# EAGLE board FY (EAGLE 9.6.2)
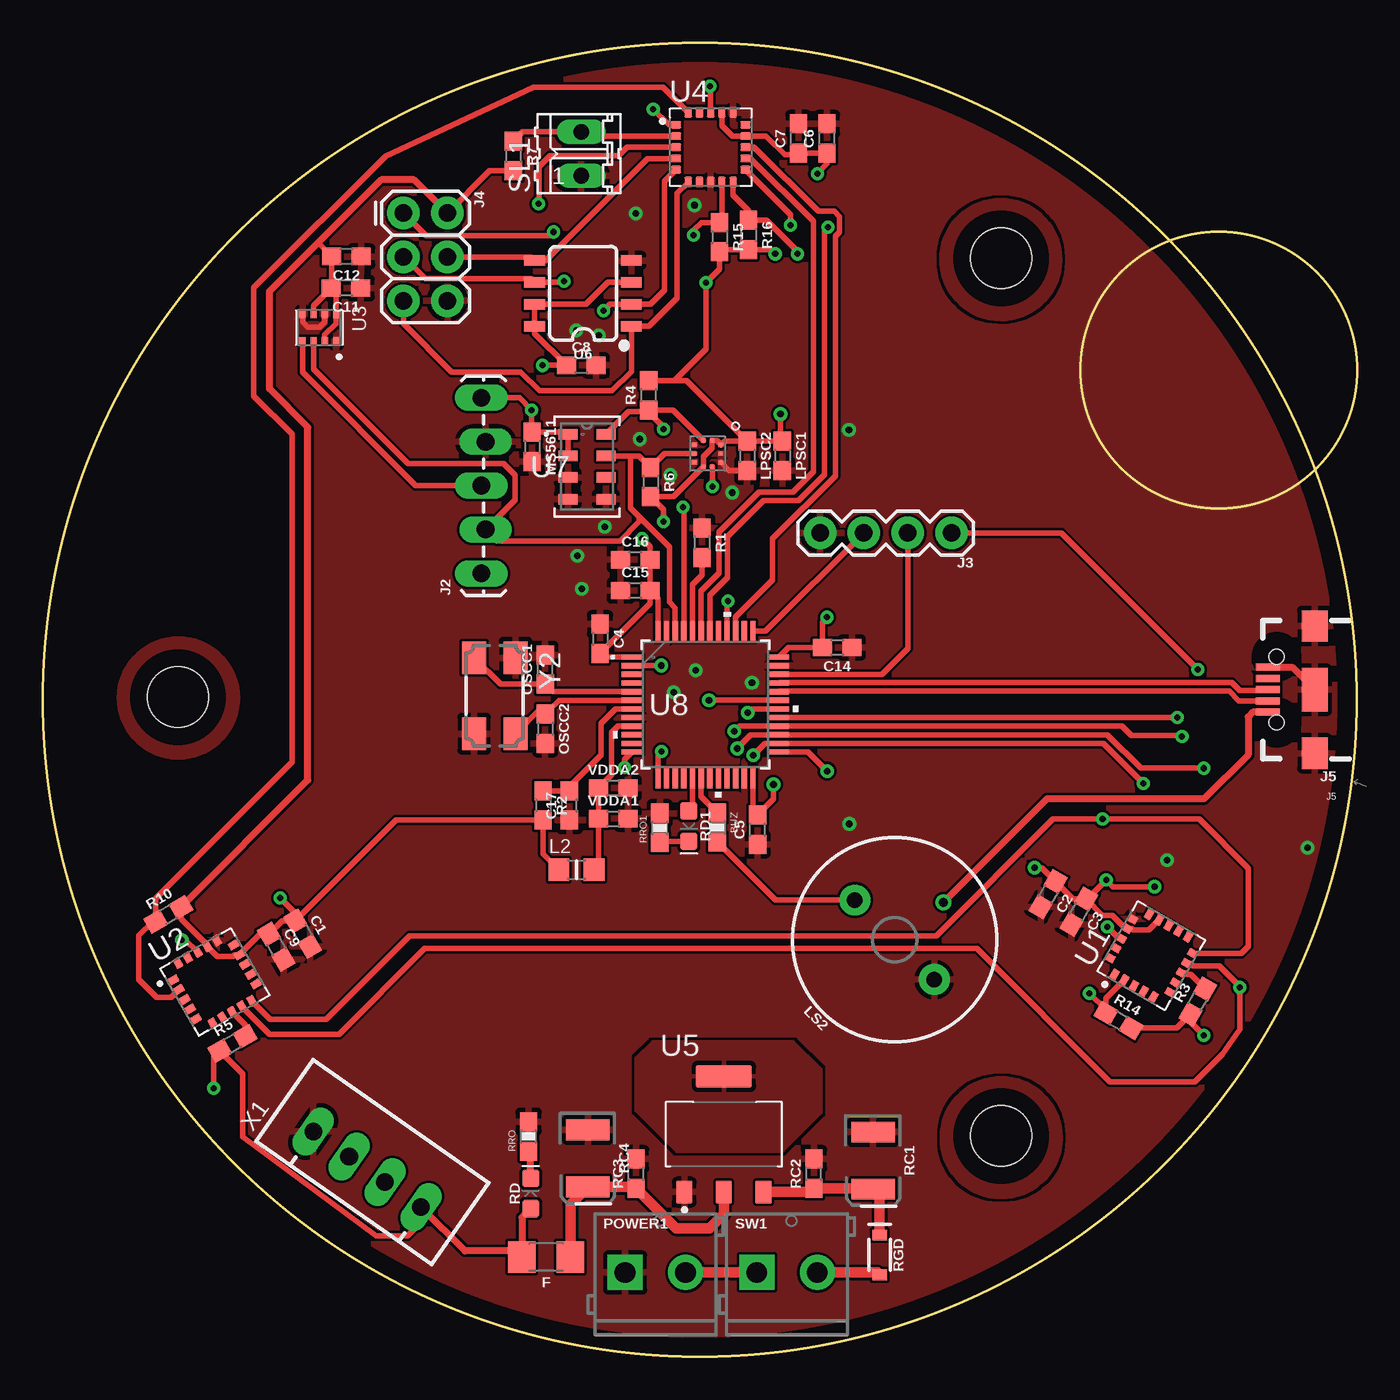
[diagram p0: board, top side]
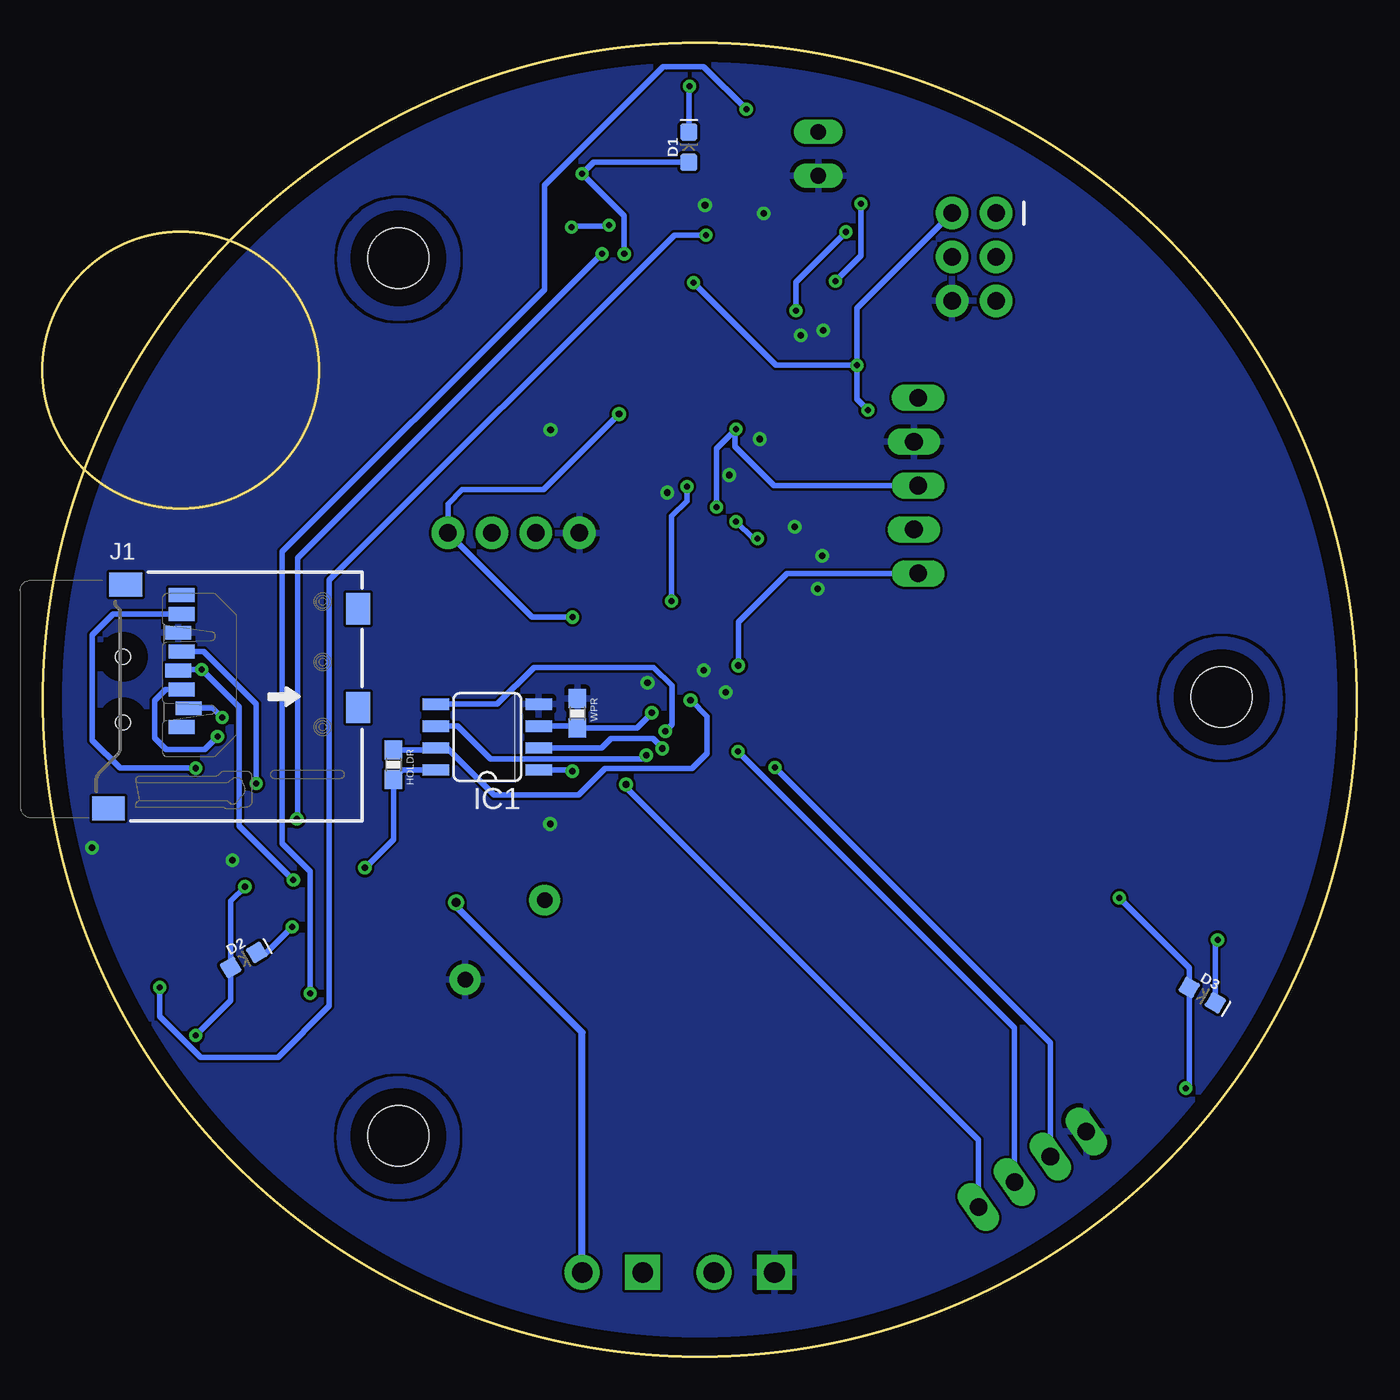
[diagram p1: board, bottom side, seen from below]

Size 76 x 76 mm. Coordinates in mm from the lower left corner, seen from the top.
Outline: circle at 38,38 radius 38
Copper layers (1*16): Top 0.035mm / dielectric 1.5mm / Bottom 0.035mm
Design rules "default *": minimum track width 6mil, minimum drill 0.35mm, track to track 6mil, track to pad 6mil, pad to pad 6mil, via to via 6mil, smd to smd 6mil, copper to edge 40mil, drill to drill 6mil, minimum pad ring 10mil, minimum via ring 8mil, stop-mask expansion 4mil, vias tented up to drill 0mil, thermal gap 10mil
Net classes: 1 Power: width 0.305 mm
Holes 3.5 mm at 55.45,12.75 7.8,38.15 55.45,63.55
Milling: area 60,49.1 to 76,65.1

## Footprints (pad centres in the part's own frame; a part is rotated, then mirrored left to right if it is on the bottom)
0603-RES = smd 1.1 x 1: 1 -0.85,0; 2 0.85,0
0603 = smd 1.1 x 1: 1 -0.85,0; 2 0.85,0
LED-0603 = smd 1 x 1: A -0.877,0; C 0.877,0
1206 = smd 1.6 x 1.8: 1 -1.4,0; 2 1.4,0
SO08-SKINNYPADS = smd 0.66 x 1.524: 1 -1.905,-2.973; 2 -0.635,-2.973; 3 0.635,-2.973; 4 1.905,-2.973; 5 1.905,2.973; 6 0.635,2.973; 7 -0.635,2.973; 8 -1.905,2.973
CON-SD-CARD_2908-05 = smd 0.8 x 1.5: 1 1.761,3.847; 2 0.669,4.253; 3 -0.423,3.847; 4 -1.515,3.644; 5 -2.607,3.847; 6 -3.7,3.644; 7 -4.792,3.847; 8 -5.884,3.847 | smd 1.397 x 1.905: GND@1 -6.5,0.6; GND@2 6.473,-0.389 | smd 1.803 x 1.397: GND@3 0.631,14.059; GND@4 -5.084,14.059
1X05_LOCK_LONGPADS = drill 1.016 long: 1 0,0; 2 2.54,-0.254; 3 5.08,0; 4 7.62,-0.254; 5 10.16,0
1X04 = drill 1.016 pad 1.88: 1 0,0; 2 2.54,0; 3 5.08,0; 4 7.62,0
2X3 = drill 1.016 pad 1.88: 1 0,0; 2 0,2.54; 3 2.54,0; 4 2.54,2.54; 5 5.08,0; 6 5.08,2.54
USB-AB-MICRO-SMD = smd 1.4 x 0.4: D+1 2.7,0; D-1 2.7,0.65; GND1 2.7,-1.3; ID1 2.7,-0.65; VBUS1 2.7,1.3 | smd 1.5 x 1.8: SHLD1 0,-3.68; SHLD2 0,3.68 | smd 1.5 x 2.5: SHLD3 0,0 | hole 0.85: 2.2,1.9; 2.2,-1.9
RC-MASTER-SMD_L0805MP = smd 1.2 x 1.3: 1 -1.016,0; 2 1.016,0
LPS22H = smd 0.25 x 0.275: 1 -0.25,-0.762; 2 0.25,-0.762; 6 0.25,0.762; 7 -0.25,0.762 | smd 0.275 x 0.25: 3 0.762,-0.5; 4 0.762,0; 5 0.762,0.5; 8 -0.762,0.5; 9 -0.762,0; 10 -0.762,-0.5
BUZZER-12MM = drill 0.9 pad 1.778: + 3.25,0; - -3.25,0
SCREWTERMINAL-3.5MM-2-NS = drill 1.2 pad 2.032 square: 1 0,0 | drill 1.2 pad 2.032: 2 3.5,0
EIA3528 = smd 1.2 x 2.5: A 1.65,0; C -1.65,0
SOD-323 = smd 0.63 x 0.83: A 1.15,0; C -1.15,0
02P = drill 0.914 long: 1 -1.27,0; 2 1.27,0
PQFN65P470X450X270-20N = smd 0.59 x 0.43: 1 -2.01,1.3; 2 -2.01,0.65; 3 -2.01,0; 4 -2.01,-0.65; 5 -2.01,-1.3; 11 2.01,-1.3; 12 2.01,-0.65; 13 2.01,0; 14 2.01,0.65; 15 2.01,1.3 | smd 0.43 x 0.59: 6 -1.3,-2.01; 7 -0.65,-2.01; 8 0,-2.01; 9 0.65,-2.01; 10 1.3,-2.01; 16 1.3,2.01; 17 0.65,2.01; 18 0,2.01; 19 -0.65,2.01; 20 -1.3,2.01
XDCR_BMP280 = smd 0.5 x 0.35: 1 0.8,0.975; 2 0.8,0.325; 3 0.8,-0.325; 4 0.8,-0.975; 5 -0.8,-0.975; 6 -0.8,-0.325; 7 -0.8,0.325; 8 -0.8,0.975
SOT229P700X180-4N = smd 0.93 x 1.31: 1 -2.29,-3.345; 2 0,-3.345; 3 2.29,-3.345 | smd 3.24 x 1.31: 4 0,3.345
SO08 = smd 0.6 x 1.2: 1 -1.905,-2.8; 2 -0.635,-2.8; 3 0.635,-2.8; 4 1.905,-2.8; 5 1.905,2.8; 6 0.635,2.8; 7 -0.635,2.8; 8 -1.905,2.8
SON8_MS5611_TEC = smd 1.092 x 0.61: 1 -1.1,1.875; 2 -1.1,0.625; 3 -1.1,-0.625; 4 -1.1,-1.875; 5 1.1,-1.875; 6 1.1,-0.625; 7 1.1,0.625; 8 1.1,1.875
LQFP48-7X7MM = smd 1.194 x 0.305: 1 -4.25,2.75; 2 -4.25,2.25; 3 -4.25,1.75; 4 -4.25,1.25; 5 -4.25,0.75; 6 -4.25,0.25; 7 -4.25,-0.25; 8 -4.25,-0.75; 9 -4.25,-1.25; 10 -4.25,-1.75; 11 -4.25,-2.25; 12 -4.25,-2.75; 25 4.25,-2.75; 26 4.25,-2.25; 27 4.25,-1.75; 28 4.25,-1.25; 29 4.25,-0.75; 30 4.25,-0.25; 31 4.25,0.25; 32 4.25,0.75; 33 4.25,1.25; 34 4.25,1.75; 35 4.25,2.25; 36 4.25,2.75 | smd 0.305 x 1.194: 13 -2.75,-4.25; 14 -2.25,-4.25; 15 -1.75,-4.25; 16 -1.25,-4.25; 17 -0.75,-4.25; 18 -0.25,-4.25; 19 0.25,-4.25; 20 0.75,-4.25; 21 1.25,-4.25; 22 1.75,-4.25; 23 2.25,-4.25; 24 2.75,-4.25; 37 2.75,4.25; 38 2.25,4.25; 39 1.75,4.25; 40 1.25,4.25; 41 0.75,4.25; 42 0.25,4.25; 43 -0.25,4.25; 44 -0.75,4.25; 45 -1.25,4.25; 46 -1.75,4.25; 47 -2.25,4.25; 48 -2.75,4.25
JST-XH-04-PACKAGE-LONG-PAD = drill 1.016 long: 1 -3.81,0; 2 -1.27,0; 3 1.27,0; 4 3.81,0
OSCCC500X320X110-4N = smd 1.9 x 1.4: 1 -2.2,-1.2; 2 2.2,-1.2; 3 2.2,1.2; 4 -2.2,1.2

## Placement (x,y rotation side)
BUZ  22R  [0603-RES]  39.02,30.61 270 top
C1  1uF  [0603]  15.01,24.46 300 top
C2  1uF  [0603]  58.17,26.75 240 top
C3  100nF  [0603]  59.95,25.73 240 top
C4  100nF  [0603]  32.23,41.53 270 top
C5  100nF  [0603]  41.35,30.48 90 top
C6  1uF  [0603]  45.37,70.49 90 top
C7  100nF  [0603]  43.72,70.49 90 top
C8  1.0uF  [0603]  31.14,57.35 0 top
C9  100nF  [0603]  13.49,23.7 300 top
C11  100nF  [0603]  17.53,61.83 180 top
C12  100nF  [0603]  17.55,63.65 180 top
C14  100nF  [0603]  45.95,41.02 180 top
C15  100nF  [0603]  34.27,44.32 0 top
C16  4.7uF  [0603]  34.27,46.1 0 top
C17  0.1uF  [0603]  30.46,31.88 90 top
D1  GREEN  [LED-0603]  38.64,69.98 90 bottom
D2  GREEN  [LED-0603]  64.39,22.94 30 bottom
D3  GREEN  [LED-0603]  8.92,20.91 330 bottom
F  0.75A  [1206]  29.11,5.74 180 top
HOLDR  10k  [0603-RES]  55.73,34.24 270 bottom
IC1  EN25F40-100GCP-TR  [SO08-SKINNYPADS]  50.29,35.84 90 bottom
J1  CON-SD-CARD_MICROSD-2908-05  [CON-SD-CARD_2908-05]  71.83,38.18 270 bottom
J2  [1X05_LOCK_LONGPADS]  25.35,45.32 90 top
J3  [1X04]  52.58,47.65 180 top
J4  FEMALE 2x3  [2X3]  20.86,66.17 270 top
J5  [USB-AB-MICRO-SMD]  73.59,38.58 180 top
L2  [RC-MASTER-SMD_L0805MP]  30.86,28.17 0 top
LPS-1  LPS22  [LPS22H]  38.46,52.25 180 top
LPSC1  4.7uF  [0603]  42.78,52.12 270 top
LPSC2  100nF  [0603]  40.74,52.12 270 top
LS2  BUZZER-PTH  [BUZZER-12MM]  49.28,24.11 135 top
MS5611  100nF  [0603]  28.3,52.63 270 top
OSCC1  25pF  [0603]  29.06,39.75 90 top
OSCC2  25pF  [0603]  29.06,36.32 270 top
POWER1  [SCREWTERMINAL-3.5MM-2-NS]  33.68,4.85 0 top
R1  10k  [0603]  38.13,47.09 270 top
R2  10k  [0603]  28.93,31.88 270 top
R3  10k  [0603]  66.83,20.52 60 top
R4  10k  [0603]  35.05,55.63 90 top
R5  10k  [0603]  10.95,18.11 30 top
R6  10k  [0603]  35.16,50.6 270 top
R7  10k  [0603]  27.21,69.47 270 top
R10  10k  [0603]  7.24,25.58 30 top
R14  10k  [0603]  62.23,19.43 330 top
R15  10k  [0603]  39.14,64.77 270 top
R16  10k  [0603]  40.82,64.9 270 top
RC1  22uF  [EIA3528]  48.03,11.33 270 top
RC2  100nF  [0603]  44.6,10.57 90 top
RC3  100nF  [0603]  34.32,10.57 90 top
RC4  22uF  [EIA3528]  31.52,11.46 270 top
RD  Red  [LED-0603]  28.22,9.43 90 top
RD1  Red  [LED-0603]  37.37,30.68 270 top
RGD  1A/23V  [SOD-323]  48.41,5.87 270 top
RRO  1.5k  [0603-RES]  28.09,12.73 90 top
RRO1  1.5k  [0603-RES]  35.69,30.58 90 top
SL1  [02P]  31.14,69.6 90 top
SW1  [SCREWTERMINAL-3.5MM-2-NS]  41.3,4.85 0 top
U1  AS72652-BLGT  [PQFN65P470X450X270-20N]  64.14,23.19 60 top
U2  AS72653-BLGT  [PQFN65P470X450X270-20N]  9.93,21.67 30 top
U3  BMP280  [XDCR_BMP280]  15.98,59.54 270 top
U4  AS72651-BLGT  [PQFN65P470X450X270-20N]  38.64,69.98 0 top
U5  AMS1117-3.3  [SOT229P700X180-4N]  39.4,12.85 0 top
U6  4MB Flash  [SO08]  31.24,61.52 90 top
U7  MS561101BA03-50  [SON8_MS5611_TEC]  31.47,51.49 0 top
U8  [LQFP48-7X7MM]  38.33,37.72 0 top
VDDA1  1uF  [0603]  33,31.12 0 top
VDDA2  10nF  [0603]  33,32.89 0 top
WPR  10k  [0603-RES]  45.09,37.21 270 bottom
X1  JST-XH-04-PIN-LONG-PAD  [JST-XH-04-PACKAGE-LONG-PAD]  18.75,10.82 325 top
Y2  ABM2B-8.000MHZ-10-1-U-T  [OSCCC500X320X110-4N]  26.14,38.23 270 top

## Library data of the parts
BUZ HOLDR RRO RRO1 WPR = SparkFun-Resistors; PROD_ID: RES-08296
C1 C2 C6 = SparkFun-Capacitors; PROD_ID: CAP-11015
C3 C7 C9 LPSC1 LPSC2 MS5611 OSCC1 OSCC2 RC2 RC3 VDDA1 VDDA2 = SparkFun-Capacitors; PROD_ID: CAP-00810
C4 C5 C14-C17 = SparkFun-Capacitors; PROD_ID: CAP-07876
C8 C11 C12 = SparkFun-Capacitors; PROD_ID: CAP-00868
D1-D3 = SparkFun-LED; PROD_ID: DIO-00821
F = SparkFun-Fuses; PROD_ID: RES-11150
IC1 = adafruit
J1 = 52101-101-REV-A_v16
J2 = SparkFun-Connectors
J3 = SparkFun-Connectors; PROD_ID: CONN-09696
J4 = SparkFun-Connectors; PROD_ID: CONN-11566
J5 = SparkFun-Connectors; PROD_ID: CONN-11794
L2 = 52101-101-REV-A_v16; ORDER_URL: https://eu.mouser.com/ProductDetail/Murata-Electronics/NFZ15SR152SN10D?qs=rkhjVJ6%2F3EK7NITaH%252B9%252Bxg%3D%3D
LPS-1 = Arduino-Sensors; CODE-ARDUINO: A5390; DATASHEET: https://www.st.com/content/ccc/resource/technical/document/datasheet/bf/c1/4f/23/61/17/44/8a/DM00140895.pdf/files/DM00140895.pdf/jcr:content/translations/en.DM00140895.pdf; DISTRIBUTOR-LINK: https://www.digikey.com/product-detail/en/stmicroelectronics/LPS22HBTR/497-16265-1-ND/5799917; DISTRIBUTOR-PN: 497-16265-1-ND; MANUFACTURER: ST; MANUFACTURER-PN: LPS22HBTR
LS2 = SparkFun-Electromechanical; PROD_ID: COMP-08253; SF_SKU: COM-07950
POWER1 SW1 = SparkFun-Connectors; PROD_ID: CONN-08399
R1-R3 R5 = SparkFun-Resistors; PROD_ID: RES-12535
R4 R6 R7 R10 R14-R16 = SparkFun-Resistors; PROD_ID: RES-00824
RC1 RC4 = SparkFun-Capacitors; PROD_ID: CAP-08063
RD RD1 = SparkFun-LED; PROD_ID: DIO-11154
RGD = SparkFun-DiscreteSemi; PROD_ID: DIO-11623
SL1 = con-amp-quick; OC_FARNELL: unknown; OC_NEWARK: unknown
U1 U2 U4 = AS7265X-BLGT; AVAILABILITY: Warning; DESCRIPTION: AS72651-BLGT LGA20 LF T&RDP; MF: ams; MP: AS72651-BLGT; PACKAGE: LGA-20 ams; PRICE: None
U3 = BMP280; AVAILABILITY: Warning; DESCRIPTION: Pressure Sensor 4.35PSI ~ 15.95PSI (30kPa ~ 110kPa) Absolute 16b 8-SMD; MF: Bosch; MP: BMP280; PACKAGE: SMD-8 Bosch Sensortec; PRICE: None; PURCHASE-URL: https://pricing.snapeda.com/search/part/BMP280/?ref=eda
U5 = AMS1117-3.3; AVAILABILITY: Unavailable; DESCRIPTION: Sot223/Pkg 1-Amp 3.3-Volt Low Drop Out Voltage Regulatator; MF: Advanced Monolithic Systems; MP: AMS1117-3.3; PACKAGE: SOT-89 ams; PRICE: None
U6 = SparkFun-IC-Memory; ORDER_URL: https://eu.mouser.com/ProductDetail/Adesto-Technologies/AT25SF041B-SHB-T?qs=wnTfsH77Xs7aj0PSgtTkzg%3D%3D; PROD_ID: IC-12455
U7 = MS5611; BUILT_BY: EMA_UL_Team; COPYRIGHT: Copyright (C) 2016 Accelerated Designs. All rights reserved; DESCRIPTION: MS5611 BAROMETRIC SENSOR CM T&R; MANUFACTURER_PART_NUMBER: MS561101BA03-50; OUTPUT-SPAN: 24 bit ADC; PACKAGE: Surface Mountable; PRODUCT_DESCRIPTION: MS5611 BAROMETRIC SENSOR CM T&R; PRODUCT_TYPE: -; SENSOR_TYPE: Digital Pressure and Altimeter Sensor Modules; SOURCELIBRARY: TE_Connectivity-2018-03-16; SUPPLY_VOLTAGE: 1.8  3.6; TE_PART_NUMBER: MS561101BA03-50; VENDOR: TE Connectivity
U8 = STM32F103C8T6; BUILT_BY: EMA_UL_Team; COPYRIGHT: Copyright (C) 2018 Accelerated Designs. All rights reserved; MANUFACTURER_PART_NUMBER: STM32F103C8T6; SOURCELIBRARY: Updates_to_database_2020-10-19; VENDOR: STMicroelectronics
X1 = Rembrandt Electronics - JST XH Connectors v1-0
Y2 = ABM3B-26.000MHZ-10-1-U-T; AVAILABILITY: Good; DESCRIPTION: 26MHz ±10ppm Crystal 10pF 50 Ohms 4-SMD, No Lead; MF: Abracon; MP: ABM3B-26.000MHZ-10-1-U-T; PACKAGE: SMD-4 Abracon LLC; PRICE: None; PURCHASE-URL: https://pricing.snapeda.com/search/part/ABM3B-26.000MHZ-10-1-U-T/?ref=eda

## Nets
3.3V [Power]: C1.1 C2.1 C3.1 C4.2 C5.2 C6.1 C7.1 C8.1 C9.1 C11.2 C12.2 C14.2 C15.2 C16.2 D1.A D2.A D3.A F.2 HOLDR.2 IC1.8 J1.4 J2.5 J3.1 J4.2 L2.1 LPS-1.1 LPS-1.6 LPS-1.10 LPSC1.1 LPSC2.1 MS5611.1 R2.2 R3.1 R4.2 R5.1 R6.2 R7.2 R10.2 R14.2 R15.2 R16.2 RD.A U1.14 U1.17 U2.14 U2.17 U3.2 U3.6 U3.8 U4.14 U4.17 U6.3 U6.7 U6.8 U7.1 U7.2 U8.1 U8.24 U8.36 U8.48 X1.4
BT0: R1.2 U8.44
BUZZER: BUZ.1 U8.18
CMISO: J4.1 U4.5 U6.2
CMOSI: J4.4 U4.4 U6.5
CS: J1.2 U8.29
CSCK: J4.3 U4.3 U6.6
CSF: IC1.1 U8.25
CSN_EE: J4.5 U4.6 U6.1
DRDY: J2.1 U8.2
GND: C1.2 C2.2 C3.2 C4.1 C5.1 C6.2 C7.2 C8.2 C9.2 C11.1 C12.1 C14.1 C15.1 C16.1 C17.1 IC1.4 J1.6 J2.4 J3.4 J4.6 J5.GND1 J5.SHLD1 J5.SHLD2 J5.SHLD3 LPS-1.3 LPS-1.5 LPS-1.8 LPS-1.9 LPSC1.2 LPSC2.2 LS2.- MS5611.2 OSCC1.2 OSCC2.2 POWER1.1 R1.1 RC1.C RC2.2 RC3.2 RC4.C RRO1.2 RRO.2 SL1.1 U1.16 U2.16 U3.1 U3.5 U3.7 U4.8 U4.16 U5.1 U6.4 U7.3 U7.4 U7.5 U8.8 U8.23 U8.35 U8.47 VDDA1.2 VDDA2.2 WPR.1 X1.1 Y2.2 Y2.4
HOLD: HOLDR.1 IC1.7 U8.31
HT: U5.4
INT: U4.13 U8.39
INT1: LPS-1.7 U8.40
LED: RD1.A U8.17
MISO: IC1.2 J1.7 U8.27
MOSI: IC1.5 J1.3 U8.28
N$1: R3.2 U1.8
N$2: RD1.C RRO1.1
N$3: POWER1.2 SW1.1
N$4: D3.C U2.18
N$5: R5.2 U2.8
N$6: F.1 RC3.1 RC4.A U5.2
N$7: D2.C U1.18
N$8: D1.C U4.18
N$9: BUZ.2 LS2.+
N$11: RD.C RRO.1
NRST: C17.2 R2.1 U8.7
OSC_IN: OSCC1.1 U8.5 Y2.1
OSC_OUT: OSCC2.1 U8.6 Y2.3
RESN: R7.1 SL1.2 U4.2
RX1: U4.12 U8.43
RX2: U8.13 X1.3
SCK: IC1.6 J1.5 U8.26
SCL: J2.3 LPS-1.2 R4.1 U3.4 U7.8 U8.45
SCL_M: R15.1 U1.9 U2.9 U4.9
SDA: J2.2 LPS-1.4 R6.1 U3.3 U7.7 U8.46
SDA_M: R16.1 U1.10 U2.10 U4.10
SLV1_R: R14.1 U1.2 U4.1
SLV2_R: R10.1 U2.2 U4.20
SWCLK: J3.3 U8.37
SWDIO: J3.2 U8.34
TX1: U4.11 U8.42
TX2: U8.12 X1.2
USB_N: J5.D-1 U8.32
USB_P: J5.D+1 U8.33
VDDA: L2.2 U8.9 VDDA1.1 VDDA2.1
VIN: J5.VBUS1 RGD.A SW1.2
VNR: RC1.A RC2.1 RGD.C U5.3
WP: IC1.3 U8.30 WPR.2

## Tracks (layer width: path | path; a pad name or v marks a point on that pad's centre or on a via)
3.3V  (via drill 0.35, 0.38)
  Top 0.305: U4.17 39.28,71.23 39.9,70.61 40.63,70.61 U4.14 41.85,70.63 42.93,69.55 43.62,69.55 C7.1 C6.1 45.37,69.01 v44.81,68.45 | LPSC2.1 LPSC1.1 42.67,53.07 v42.67,54.54 | LPSC2.1 39.44,52.97 LPS-1.10 39.22,52.78 38.99,53.01 LPS-1.1 38.71,52.58 38.21,52.08 LPS-1.6 36.47,49.75 R6.2 35.89,49.01 v35.89,48.31 | C15.2 C16.2 35.12,46.85 v34.65,47.32 | C15.2 35.58,43.86 U8.48 | U8.1 32.44,40.47 C4.2 35.12,43.56 C15.2 | U7.2 U7.1 30.25,53.48 MS5611.1 28.27,53.51 v28.27,54.76 27.56,55.48 J2.5 | U8.36 43.13,41.02 C14.2 45.1,42.51 v45.37,42.78 | J4.2 25.85,68.62 R7.2 | U6.3 32.69,62.16 31.42,60.89 U6.7 U6.8 28.44,59.2 C8.1 v28.91,57.35 | R10.2 7.98,25.32 9.49,23.81 U2.17 10.07,23.15 11.01,23.15 11.09,23.24 U2.14 12.55,24.44 C9.1 13.83,25.2 C1.1 | X1.4 21.87,7.75 21.08,6.96 19.28,6.96 11.56,12.69 11.56,16.34 R5.1 9.86,17.33 v9.86,15.52 | L2.1 28.93,29.08 R2.2 20.42,31.03 C1.1 | C3.1 61.31,25.53 61.88,25.53 62.65,24.76 U1.17 62.98,24.76 63.06,24.68 64,24.68 U1.14 | C3.1 59.61,26.47 C2.1 57.8,28.27 v57.38,28.27 | R14.2 65.62,19.01 66.31,19.7 | 66.31,19.7 R3.1 | v67.18,18.57 66.31,19.44 66.31,19.7 | v13.72,26.52 14.59,25.65 C1.1 | U8.24 41.08,31.6 C5.2 42.27,32.25 v42.27,33.1 | v42.37,63.81 42.13,64.05 R16.2 39.27,64.05 R15.2 39.14,62.92 v38.36,62.13 38.36,58.28 36.55,56.48 R4.2 37.24,56.48 LPSC2.1 | J3.1 58.93,47.65 v66.83,39.75 | C3.1 60.43,26.47 v61.52,27.56 61.9,27.18 v64.31,27.18 | C11.2 16.7,61.85 C12.2 15.9,64.44 | C11.2 16.95,61.55 U3.8 16.95,59.78 16.3,59.13 U3.2 | U3.6 15.65,60.8 C11.2
  Top 0.406: X1.4 24.41,6.1 27.35,6.1 F.2 27.71,8.04 RD.A | J4.2 21.46,68.1 19.56,68.1 15.9,64.44 13.09,61.63 13.09,56 15.32,53.77 15.32,33.35 R10.2
  Bottom 0.305: J4.2 28.91,60.66 v28.91,57.35 | v28.91,57.35 33.58,57.35 v38.36,62.13 | v67.18,18.57 65.15,20.6 D2.A 65.15,26.34 v64.31,27.18 | v9.86,15.52 9.68,15.7 D3.A 9.68,22.48 v13.72,26.52 | v45.37,42.78 47.7,42.78 J3.1 52.58,49.33 51.74,50.17 47.04,50.17 v42.67,54.54 | v35.89,48.31 34.9,47.32 v34.65,47.32 | v28.91,57.35 28.91,55.4 v28.27,54.76 | D1.A 44.16,69.1 v44.81,68.45 42.37,66.02 v42.37,63.81 | J1.4 68.13,39.75 v66.83,39.75 64.64,37.57 64.64,30.68 v61.52,27.56 | X1.4 21.87,12.52 42.27,32.92 v42.27,33.1 | IC1.8 55.18,33.94 HOLDR.2 55.73,29.92 v57.38,28.27
BT0
  Top 0.305: R1.2 38.13,45.21 37.58,44.66 U8.44
BUZZER
  Top 0.305: U8.18 38.08,32.39 BUZ.1
CMISO  (via drill 0.35)
  Top 0.305: J4.1 22.15,64.87 23.91,64.87 23.94,64.85 29.31,64.85 v29.54,65.08 | U4.5 35.97,68.02 35.97,61.7 35.15,60.89 U6.2 32.79,60.89 v32.44,60.53
  Bottom 0.305: v29.54,65.08 32.44,62.18 v32.44,60.53
CMOSI
  Top 0.305: J4.4 28.24,63.63 U6.5 29.08,63.43 34.99,69.33 U4.4
CS  (via drill 0.35)
  Top 0.305: U8.29 65.62,36.97 v65.63,36.98
  Bottom 0.305: v65.63,36.98 65.66,36.98 66.18,37.51 J1.2
CSCK  (via drill 0.35)
  Top 0.305: J4.3 22.12,62.36 28.24,62.36 U6.6 30.07,62.16 v30.15,62.23 | U4.3 33.78,69.98 33.3,69.5 29.34,69.5 28.7,68.86 28.7,66.73 v28.68,66.7
  Bottom 0.305: v28.68,66.7 28.68,63.7 v30.15,62.23
CSF  (via drill 0.38)
  Top 0.305: v45.37,33.87 44.27,34.97 U8.25
  Bottom 0.305: IC1.1 45.43,33.94 v45.37,33.87
CSN_EE
  Top 0.305: U4.6 36.68,67.31 36.68,61.24 35.05,59.62 U6.1 34.04,57.01 32.92,55.88 28.73,55.88 27.64,56.97 23.65,56.97 20.85,59.77 J4.5
D1
  pour Top: 11.33,38.1 arc-90 7.8,34.6 arc-90 4.32,38.13 arc-90 7.82,41.61 arc-90
  pour Bottom: 4.32,38.08 arc90 7.8,34.6 arc90 11.33,38.13 arc90 7.77,41.61 arc90
D2
  pour Top: 58.93,63.48 arc-90 55.4,59.97 arc-90 51.92,63.5 arc-90 55.42,66.98 arc-90
  pour Bottom: 51.92,63.45 arc90 55.4,59.97 arc90 58.93,63.5 arc90 55.37,66.98 arc90
D3
  pour Top: 58.95,12.65 arc-90 55.42,9.15 arc-90 51.94,12.68 arc-90 55.45,16.16 arc-90
  pour Bottom: 51.94,12.63 arc90 55.42,9.15 arc90 58.95,12.68 arc90 55.4,16.16 arc90
DRDY  (via drill 0.38)
  Top 0.305: v35.76,39.98 U8.2
  Bottom 0.305: J2.1 32.95,45.32 35.76,42.5 v35.76,39.98
GND  (via drill 0.38)
  Top 0.305: LPS-1.8 39.7,51.27 LPSC2.2 | U3.7 16.3,59.86 16,59.56 15.32,59.56 15,59.88 U3.5
  Top 0.406: J5.GND1 72.29,39.88 J5.SHLD3
  other vias: 46.64,53.62 39.88,49.99 36.3,51 34.52,53.09 32.51,48.01 37.7,66.63 65.05,28.7 73.18,29.44 34.29,66.14 31.17,44.43 37.77,39.7 30.91,46.33 30.86,59.39 32.16,59.08 41.02,38.99 46.66,30.81 36.5,38.43
  pour Top (rank 2): -3.91,79.07 -3.91,-3.91 79.91,-3.91 79.91,79.07
  pour Bottom (rank 2): -5.28,79.91 -5.28,-5.18 81.18,-5.18 81.18,79.91
HOLD  (via drill 0.38)
  Top 0.305: v38.53,37.97 U8.31
  Bottom 0.305: HOLDR.1 53.38,35.09 IC1.7 52.63,35.21 49.91,32.49 45.01,32.49 43.49,34.01 38.46,34.01 37.57,34.9 37.57,37.03 38.51,37.97 v38.53,37.97
HT
  pour Top: 35.26,18.24 43.44,18.24 45.04,16.64 45.04,14.1 42.78,11.84 36.65,11.84 34.29,14.2 34.29,17.27
INT
  Top 0.305: U4.13 41.15,69.98 44.86,66.27 45.8,66.27 46.1,65.97 46.1,65.07 45.85,64.82 45.85,50.95 42.21,47.32 42.21,44.92 40.08,42.78 U8.39
INT1  (via drill 0.35)
  Top 0.305: U8.40 39.58,43.67 v39.63,43.72 | v38.74,50.34 38.74,51.46 LPS-1.7
  Bottom 0.305: v39.63,43.72 39.63,48.62 38.74,49.51 v38.74,50.34
LED
  Top 0.305: U8.17 37.58,31.78 RD1.A
MISO  (via drill 0.35, 0.38)
  Top 0.305: v67.18,34.04 63.53,34.04 61.59,35.97 U8.27 40.95,35.97 v40.16,35.18
  Bottom 0.305: v67.18,34.04 71.55,34.04 73.15,35.64 73.15,41.75 71.93,42.97 J1.7 | IC1.2 43.69,35.21 43.13,35.76 40.72,35.76 40.16,35.21 v40.16,35.18
MOSI  (via drill 0.35, 0.38)
  Top 0.305: v65.91,35.87 65.86,35.92 62.99,35.92 62.44,36.47 U8.28 40.31,36.47 v40.01,36.17
  Bottom 0.305: v65.91,35.87 66.65,35.13 68.89,35.13 69.55,35.79 69.55,37.96 68.91,38.6 J1.3 | IC1.5 49.73,37.75 47.6,39.88 40.67,39.88 39.6,38.81 39.6,36.58 v40.01,36.17
N$1
  Top 0.305: U1.8 66.14,22.19 66.22,22.1 66.41,22.1 R3.2
N$2
  Top 0.305: RD1.C 35.76,29.81 RRO1.1
N$3
  Top 0.61: POWER1.2 SW1.1
N$4  (via drill 0.35)
  Top 0.305: v8.03,24.11 8.23,24.11 U2.18
  Bottom 0.305: D3.C 8.16,23.98 v8.03,24.11
N$5
  Top 0.305: U2.8 11.68,19.18 R5.2
N$6
  Top 0.61: F.1 30.51,8.79 RC4.A 34.23,9.81 RC3.1 36.62,7.42 38.56,7.42 39.4,8.26 U5.2
N$7  (via drill 0.35)
  Top 0.305: U1.18 62.24,24.2 v61.6,24.84
  Bottom 0.305: v61.6,24.84 63.06,23.38 D2.C
N$8  (via drill 0.35)
  Top 0.305: v38.58,73.51 38.63,73.46 U4.18
  Bottom 0.305: D1.C 38.63,73.46 v38.58,73.51
N$9
  Top 0.305: BUZ.2 42.37,26.4 LS2.+
N$11
  Top 0.406: RD.C 28.22,11.75 RRO.1
NRST
  Top 0.305: R2.1 C17.2 30.46,32.97 32.28,34.8 32.28,36.63 33.13,37.47 U8.7
OSC_IN
  Top 0.305: U8.5 29.49,38.47 OSCC1.1 26.46,38.9 Y2.1
OSC_OUT
  Top 0.305: OSCC2.1 29.28,37.4 | 29.28,37.4 29.86,37.97 U8.6 | Y2.3 28.71,37.4 29.28,37.4
RESN
  Top 0.305: U4.2 31.38,70.63 SL1.2 27.75,70.87 R7.1
RX1
  Top 0.305: U4.12 40.94,69.33 44.58,65.69 44.58,51.21 43.4,50.03 41.44,50.03 39.12,47.7 39.12,45.34 38.08,44.3 U8.43
RX2  (via drill 0.35)
  Top 0.305: v35.79,35 35.58,34.79 U8.13
  Bottom 0.305: X1.3 19.79,19 v35.79,35
SCK  (via drill 0.35, 0.38)
  Top 0.305: v63.68,33.15 61.36,35.47 U8.26 41.77,35.47 v41.1,34.8
  Bottom 0.305: v63.68,33.15 63.68,37.75 66.72,40.79 J1.5 | IC1.6 52.02,36.48 50.12,34.57 41.33,34.57 v41.1,34.8
SCL  (via drill 0.35)
  Top 0.305: LPS-1.2 36.44,54.78 R4.1 34.9,54.78 35,54.68 | 35,54.68 33.89,54.68 U7.8 | U8.45 37.08,49.11 v37.03,49.15 | v35.89,53.67 35.89,53.79 35,54.68 | U3.4 15,56.96 21.57,50.4 J2.3
  Bottom 0.305: v37.03,49.15 37.03,52.53 v35.89,53.67 35.97,53.6 35.97,52.66 33.71,50.4 J2.3
SCL_M  (via drill 0.35)
  Top 0.305: U4.9 39.28,65.76 R15.1 38.1,65.62 37.64,65.16 v37.64,64.9 | U1.9 66.38,22.75 66.54,22.59 68.08,22.59 69.27,21.41 v69.27,21.36 69.27,18.93 68.24,17.47 66.65,15.88 61.75,15.88 54.03,23.6 22.07,23.6 17.12,18.65 13.11,18.65 U2.9
  Bottom 0.305: v37.64,64.9 39.47,64.9 59.44,44.93 59.44,20.27 62.41,17.3 66.88,17.3 67.87,18.29 | 67.87,18.29 | v69.27,21.36 69.27,19.69 67.87,18.29
SDA
  Top 0.305: LPS-1.4 35.96,52.25 R6.1 34.49,52.11 33.99,52.11 | 33.99,52.11 U7.7 | 33.99,52.11 33.99,49.1 34.49,48.59 | U8.46 36.58,43.32 36.25,43.65 36.25,46.84 34.49,48.59 | 34.49,48.59 34.49,48.31 33.38,47.19 26.26,47.19 J2.2 27.31,49.56 27.31,51 26.65,51.67 21.13,51.67 15.65,57.15 U3.3
SDA_M  (via drill 0.35)
  Top 0.305: U4.10 39.93,67.19 40.82,66.31 R16.1 41.87,65.75 43.66,63.96 v43.66,63.81 | U1.10 69.34,23.31 69.75,23.73 69.75,28.25 66.9,31.09 v61.32,31.09 58.45,31.09 51.69,24.33 21.21,24.33 16.38,19.51 13.13,19.51 U2.10
  Bottom 0.305: v43.66,63.81 61.27,46.2 61.27,31.14 v61.32,31.09
SLV1_R  (via drill 0.35)
  Top 0.305: U4.1 36.22,71.28 v35.31,72.19 | v60.55,21.01 61.5,20.07 R14.1 61.5,20.7 U1.2
  Bottom 0.305: v35.31,72.19 37.77,74.65 40.13,74.65 46.99,67.79 46.99,61.75 62.16,46.59 62.16,29.67 60.55,28.07 v60.55,21.01
SLV2_R
  Top 0.305: U4.20 35.86,73.46 28.38,73.46 19.81,69.47 12.19,61.85 12.19,55.58 14.4,53.37 14.4,34.39 6.5,26.49 R10.1 6.33,25.15 5.54,24.36 5.54,21.82 6.58,20.78 7.42,20.78 U2.2
SWCLK
  Top 0.305: U8.37 41.82,41.97 J3.3
SWDIO
  Top 0.305: U8.34 48.53,39.47 50.04,40.98 J3.2
TX1  (via drill 0.35)
  Top 0.305: U8.42 38.58,44.07 39.6,45.09 39.6,47.45 41.68,49.53 43.71,49.53 45.21,51.03 45.21,65.15 v45.42,65.36 | v43.26,65.46 43.26,66.07 U4.11
  Bottom 0.305: v43.26,65.46 43.31,65.41 45.37,65.41 v45.42,65.36
TX2  (via drill 0.35)
  Top 0.305: v33.66,34.09 33.66,34.55 U8.12
  Bottom 0.305: X1.2 17.71,18.14 v33.66,34.09
USB_N
  Top 0.305: U8.32 42.61,38.5 68.64,38.5 69.21,37.93 J5.D-1
USB_P
  Top 0.305: U8.33 42.61,39 68.79,39 69.26,38.53 70.83,38.53 J5.D+1
VDDA
  Top 0.305: L2.2 32.15,28.44 VDDA1.1 VDDA2.1 32.89,33.64 32.89,36.1 33.27,36.47 U8.9
VIN  (via drill 0.51)
  Top 0.406: v52.1,26.27 58.09,32.26 67.18,32.26 69.74,34.82 69.74,37 70.02,37.28 J5.VBUS1
  Top 0.61: SW1.2 48.28,4.85 RGD.A
  Bottom 0.406: v52.1,26.27 52.15,26.21 52.15,26.09 44.8,18.74 SW1.2
VNR
  Top 0.61: U5.3 44.39,9.51 RC2.1 47.99,9.72 RC1.A 48.41,9.3 RGD.C
WP  (via drill 0.38)
  Top 0.305: U8.30 41,37.47 v40.77,37.24
  Bottom 0.305: IC1.3 45.2,36.48 WPR.2 41.64,36.36 v40.77,37.24